# Altium PCB Genimi_v7.PcbDoc
Units mil, origin at the board's own origin, x right, y up, seen from the top; angles counter-clockwise.
Board outline 1500 x 750 mil, 4 copper layers (Top Layer, Signal Layer 1, Signal Layer 2, Bottom Layer), stack 30.634 mil thick; 84 components, 65 nets, 301 pads, 112 vias.
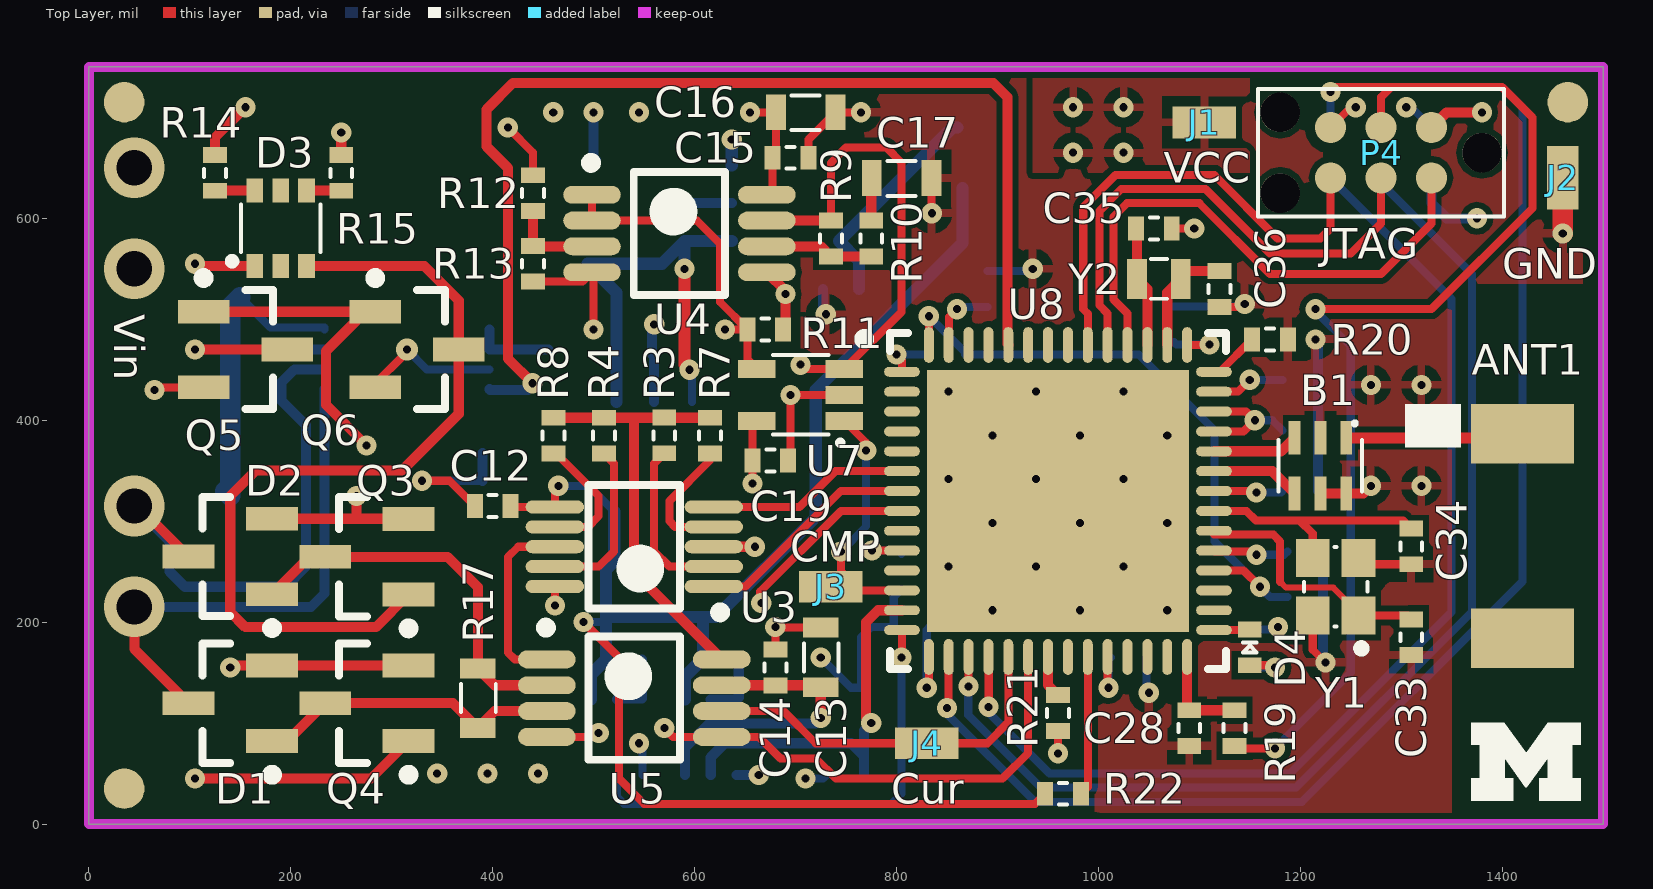
[diagram p0: Top Layer view]
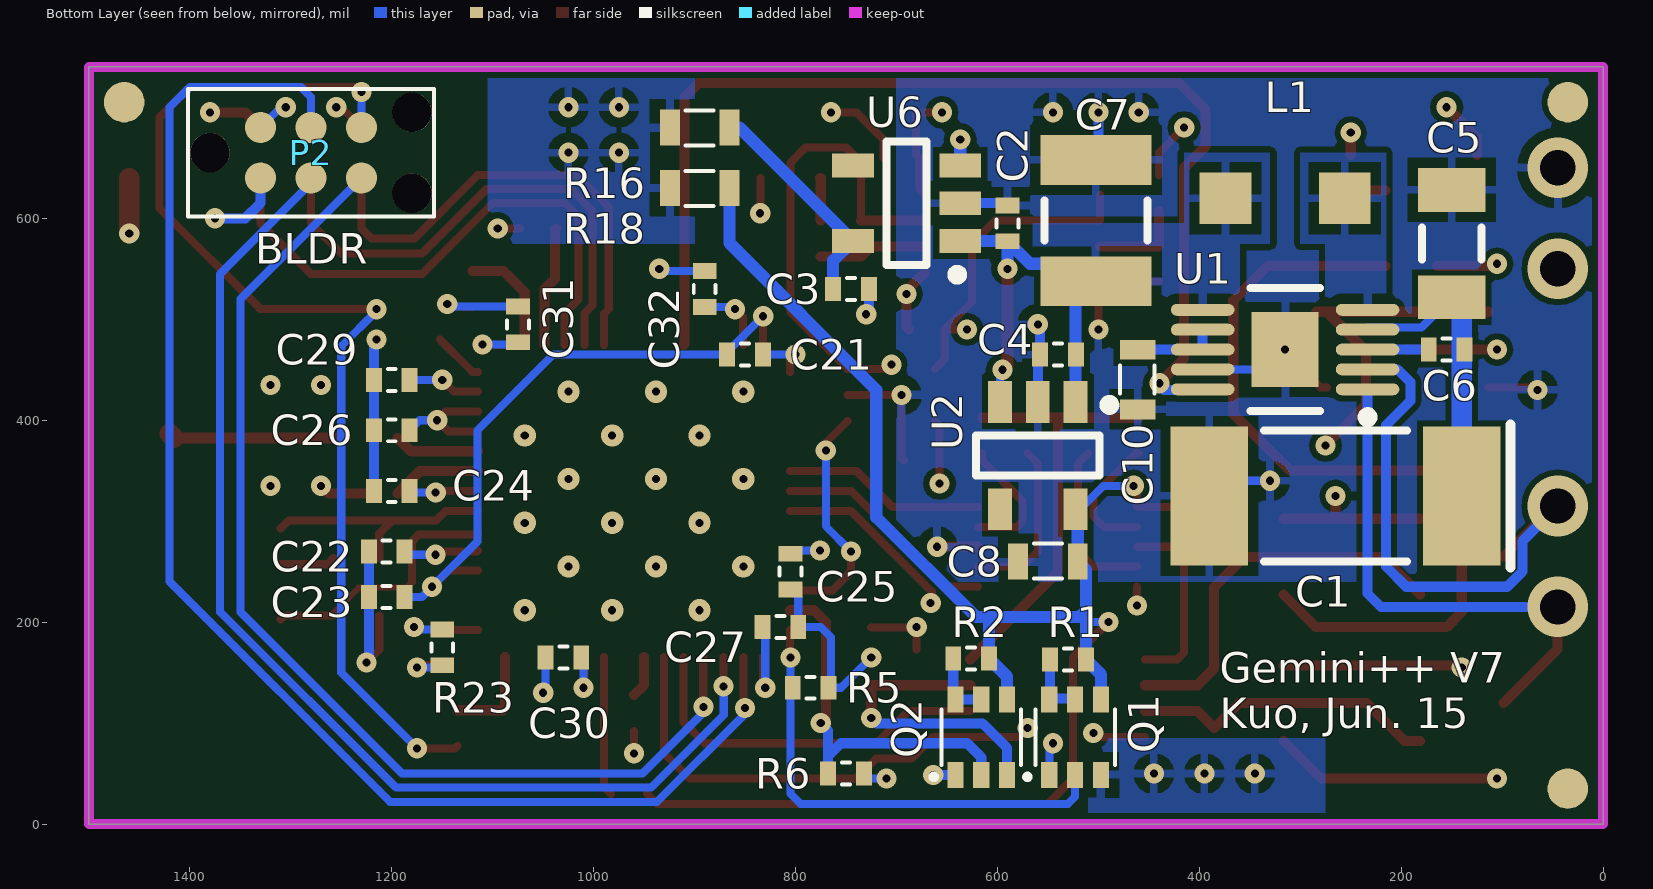
[diagram p1: Bottom Layer view, seen from below]
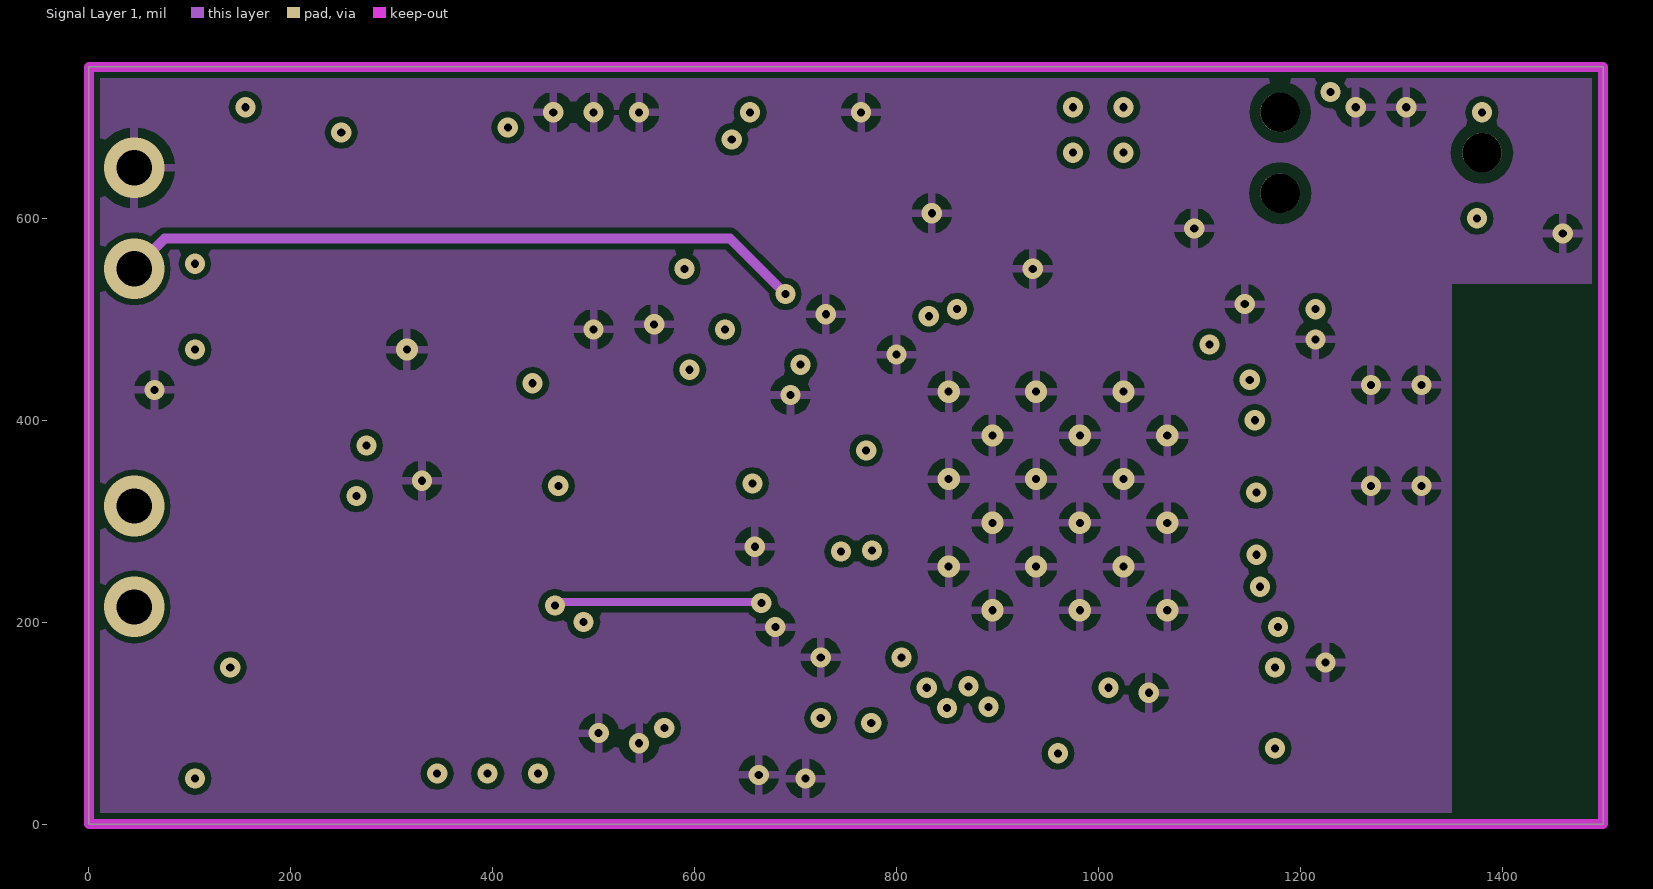
[diagram p2: Signal Layer 1]
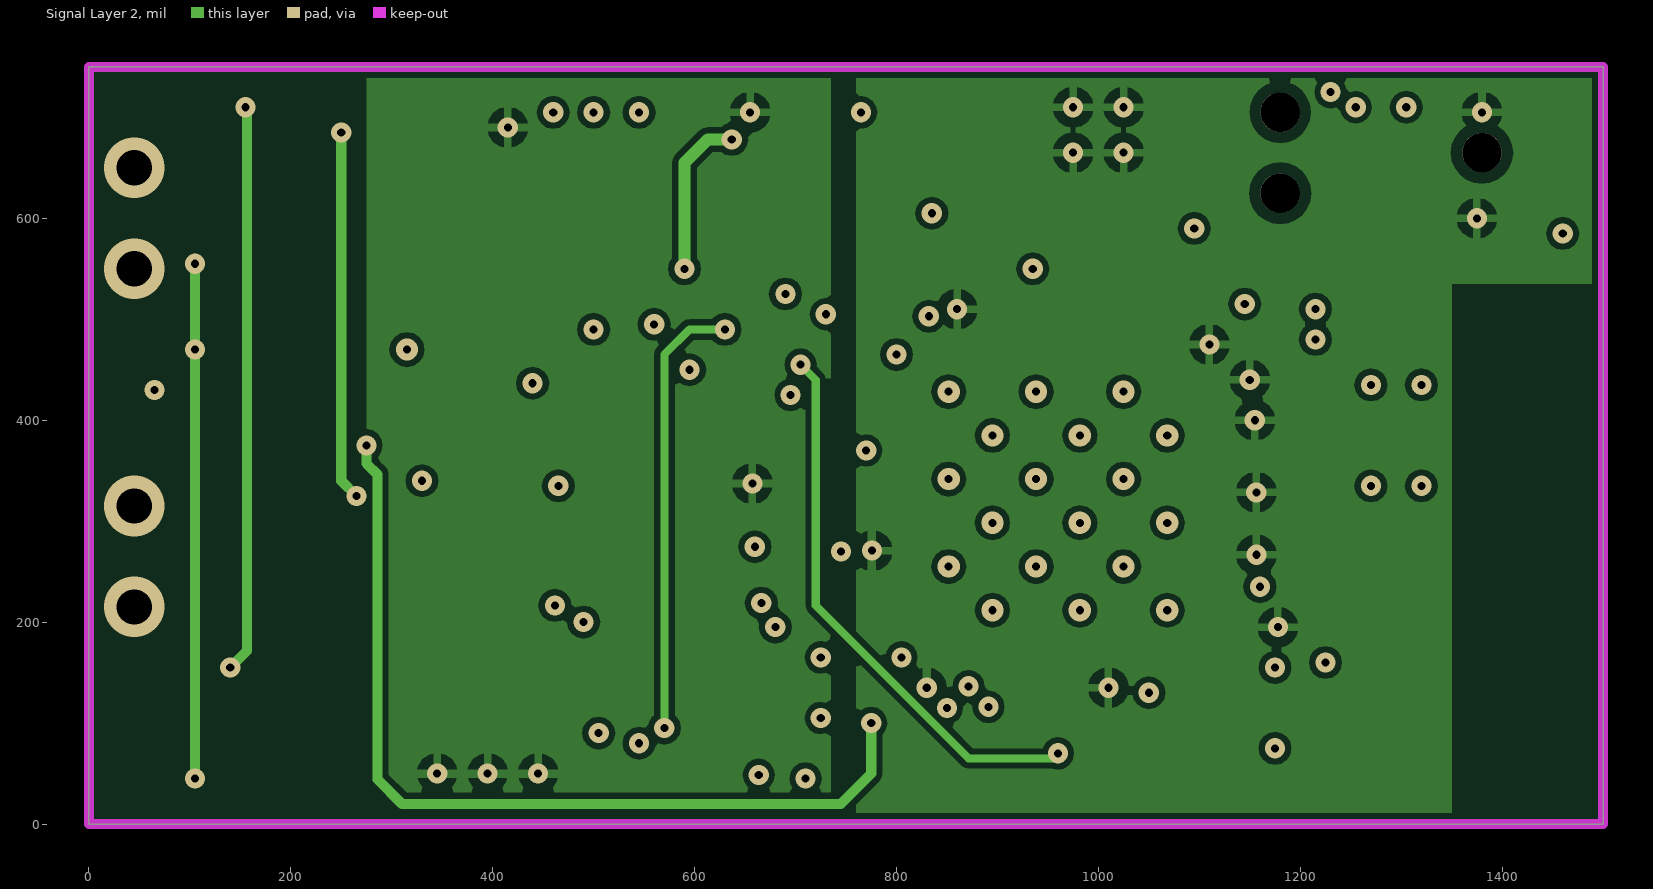
[diagram p3: Signal Layer 2]

## Layer stack, top to bottom
Top Solder: solder mask 0.4, Solder Resist, Dk 3.5
Top Layer: signal copper 1.4
Dielectric 1: core 10, FR-4, Dk 4.2
Signal Layer 1: signal copper 1.417
Dielectric 3: prepreg 5, Dk 4.2
Signal Layer 2: signal copper 1.417
Dielectric 2: core 10, Dk 4.2
Bottom Layer: signal copper 1.4
Bottom Solder: solder mask 0.4, Solder Resist, Dk 3.5

## Board outline
0,0 0,750 1500,750 1500,0

## Design rules (kind name [scope] priority, off if disabled: settings)
Clearance "non plated holes" [InPadClass('NPHOLES') vs (OnLayer('Signal Layer 1')) or (OnLayer('Signal Layer 2'))] p1: gap=11 // Sunstone Circuits Minimum Clearance Rule (MLB~4&6 Layer Designs)
Clearance "Clearance~Sunstone Circuits" [All] p2: gap=6 // Sunstone Circuits Minimum Clearance Rule (MLB~4&6 Layer Designs)
DiffPairsRouting [All] p1: maxlimit=10 minlimit=10 mostfreqgap=10 toplayer_minwidth=6 toplayer_maxwidth=15 toplayer_prefwidth=15 midlayer1_minwidth=6 midlayer1_maxwidth=15 midlayer1_prefwidth=15 midlayer2_minwidth=6 midlayer2_maxwidth=15 midlayer2_prefwidth=15 bottomlayer_minwidth=6 bottomlayer_maxwidth=15 bottomlayer_prefwidth=15 maxuncoupledlength=500
HoleSize "HoleSize~Sunstone Circuits" [All] p1: absolutevalues=TRUE maxlimit=251 minlimit=8 maxpercent=80.000 minpercent=20.000 // Sunstone Circuits Hole Size Rule (MLB~4&6 Layer Designs)
HoleSize Testpoint [All] p2: absolutevalues=TRUE maxlimit=100 minlimit=1 maxpercent=80.000 minpercent=20.000
HoleSize TestPointUsage [All] p3: absolutevalues=TRUE maxlimit=100 minlimit=1 maxpercent=80.000 minpercent=20.000
MinimumAnnularRing "MinimumAnnularRing~Sunstone Circuits" [All] p1 off: minimumring=6 // Sunstone Circuits Minimum Annular Ring (MLB~4&6 Layer Designs)
MinimumSolderMaskSliver [All] p1 off: minsoldermaskwidth=10
PlaneClearance "PlaneClearance~Sunstone Circuits" [All] p1: clearance=12 // Sunstone Circuits Power Plane Clearance Rule (MLB~4&6 Layer Designs)
PlaneConnect "PlaneConnect~Sunstone Circuits" [All] p1: planeconnectstyle=Relief reliefexpansion=10 reliefentries=4 reliefconductorwidth=8 reliefairgap=10 // Sunstone Circuits Power Plane Connect Rule (MLB~4&6 Layer Designs)
PolygonConnect "PolygonConnect~Sunstone Circuits" [All] p1: connectstyle=Relief reliefconductorwidth=8 reliefentries=4 polygonreliefangle="90 Angle" airgapwidth=10 // Sunstone Circuits Polygon Connect Style (MLB~4&6 Layer Designs)
RoomDefinition MCU [InComponentClass('MCU')] p1 off: confinementstyle=ConfineIn formatcopy=TRUE lockcomponents=FALSE outline 690.5,206.25 690.5,263.75 748.23,263.75 748.23,513.07 838.74,513.07 838.74,724.61 1145.98,724.61 1145.98,739.96 1414.02,739.96 1414.02,684.5 1488.75,684.5 1488.75,436.06 1491.1,436.06 1491.1,136.54 1163.7,136.54 1163.7,52.52 1007.48,52.52 1007.48,1.3 922.52,1.3 922.52,51.25 785.5,51.25 785.5,126.93 748.23,126.93 748.23,206.25
RoomDefinition IVSense [InComponentClass('IVSense')] p2 off: confinementstyle=ConfineIn formatcopy=TRUE lockcomponents=FALSE outline 391.3,317.52 391.3,402.48 411.3,402.48 411.3,667.48 450,667.48 450,674.72 652.52,674.72 652.52,688.7 653.74,688.7 653.74,739.61 766.26,739.61 766.26,674.61 861.26,674.61 861.26,605.39 827.48,605.39 827.48,106.3 792.48,106.3 792.48,21.3 707.52,21.3 707.52,22.84 471.66,22.84 471.66,42.83 405.32,42.83 405.32,189.84 405.32,317.52
RoomDefinition harvesting2 [InComponentClass('harvesting2')] p3 off: confinementstyle=ConfineIn formatcopy=TRUE lockcomponents=FALSE outline 68.74,440.39 68.74,509.61 85.63,509.61 85.63,695.71 217.35,695.71 217.35,700.87 418.06,700.87 418.06,720.47 569.94,720.47 569.94,696.85 776.82,696.85 776.82,558.7 787.48,558.7 787.48,501.3 641.85,501.3 641.85,278.18 606.26,278.18 606.26,225.39 493.74,225.39 493.74,235.28 76.77,235.28 76.77,440.39
RoomDefinition current_switch [InComponentClass('current_switch')] p4 off: confinementstyle=ConfineIn formatcopy=TRUE lockcomponents=FALSE outline 26.57,28.98 26.57,345.55 66.26,345.55 66.26,560.71 96.3,560.71 96.3,687.48 278.7,687.48 278.7,560.71 403.74,560.71 403.74,180.94 419.92,180.94 419.92,68.43 364.06,68.43 364.06,28.98
RoutingVias "RoutingVias~Sunstone Circuits" [All] p1: holewidth=16 width=20 viastyle="Through Hole" minholewidth=6 minwidth=20 maxholewidth=20 maxwidth=40 // Sunstone Circuits Routing Vias Rule (MLB~4&6 Layer Designs)
ShortCircuit "ShortCircuit~Sunstone Circuits" [All] p1: allowed=FALSE // Sunstone Circuits Short Circuit Rule~Do Not Allow (MLB~4&6 Layer Designs)
SilkToSilkClearance [All] p1 off: silktosilkclearance=10
SilkToSolderMaskClearance [IsPad] p1 off: minsilkscreentomaskgap=10 clearancetoexposedcopper=TRUE
SolderMaskExpansion TentVias [isVia] p1: expansion=-20 // Sunstone Circuits Solder Mask Expansion Rule (MLB~4&6 Layer Designs)
SolderMaskExpansion "SolderMaskExpansion~Sunstone Circuits" [All] p2: expansion=3 // Sunstone Circuits Solder Mask Expansion Rule (MLB~4&6 Layer Designs)
ViasUnderSMD "ViasUnderSMD~Sunstone Circuits" [All] p1: allowed=FALSE // Sunstone Circuits Vias Under SMD~Do Not Allow (MLB~4&6 Layer Designs)
Width "Width~Sunstone Circuits" [All] p1: maxlimit=100 minlimit=6 preferedwidth=8 // Sunstone Circuits Minimum Width Rule (MLB~4&6 Layer Designs)
22 further rules are at their usual default settings.

## Classes and differential pairs
pad class NPHOLES: P4-0
component class MCU: ANT1 B1 C21 C22 C23 C24 C25 C26 C27 C28 C29 C30 C31 C32 C33 C34 C35 C36 D4 J1 J2 J3 J4 P2 P4 R16 R18 R19 R20 R21 R22 R23 U8 Y1 Y2
component class IVSense: C12 C13 C14 C15 C16 C17 C19 Q1 Q2 R1 R2 R3 R4 R5 R6 R7 R8 R9 R10 R11 R12 R13 U3 U4 U5 U7
component class harvesting2: C1 C2 C3 C4 C5 C6 C7 C8 C10 L1 U1 U2 U6
component class current_switch: D1 D2 D3 Q3 Q4 Q5 Q6 R14 R15 R17
differential pair CC2538_RF: +CC2538_RF_P -CC2538_RF_N

## Components (designator, comment, footprint, x,y, rotation, side; value= is the part's Value field where it differs from the comment)
ANT1 "Ground Antenna" "Chip Antenna" 1425,305 r270 top
B1 "2450BM15A0002E" 2450BM15A0002 1220,355 r270 top
C1 "Ceramic capacitor" 2917 265,325 r0 bottom
C2 "Ceramic capacitor" 0402 590,595 r90 bottom
C3 "Ceramic capacitor" 0402 745,530 r180 bottom
C4 "Ceramic capacitor" 0402 540,465 r0 bottom
C5 "Ceramic capacitor" 1206 150,575 r90 bottom
C6 "Ceramic capacitor" 0402 155,470 r0 bottom
C7 "Ceramic capacitor" 1210 498.39,597.8 r270 bottom
C8 "Ceramic capacitor" 0603 550,260 r0 bottom
C10 "Ceramic capacitor" 0603 461,440.31 r270 bottom
C12 "Ceramic capacitor" 0402 400,315 r180 top
C13 "Ceramic capacitor" 0603 725,165 r90 top
C14 "Ceramic capacitor" 0402 680,155 r90 top
C15 "Ceramic capacitor" 0402 695,660 r0 top
C16 "Ceramic capacitor" 0603 710,705 r0 top
C17 "Ceramic capacitor" 0603 805,640 r0 top
C19 "Ceramic capacitor" 0402 675,360 r0 top
C21 "Ceramic capacitor" 0402 850,465 r180 bottom
C22 "Ceramic capacitor" 0402 1205,270 r0 bottom
C23 "Ceramic capacitor" 0402 1205,225 r0 bottom
C24 "Ceramic capacitor" 0402 1200,330 r0 bottom
C25 "Ceramic capacitor" 0402 805,250 r270 bottom
C26 "Ceramic capacitor" 0402 1200,390 r0 bottom
C27 "Ceramic capacitor" 0402 815,195 r180 bottom
C28 "Ceramic capacitor" 0402 1090,95 r270 top
C29 "Ceramic capacitor" 0402 1200,440 r0 bottom
C30 "Ceramic capacitor" 0402 1030,165 r0 bottom
C31 "Ceramic capacitor" 0402 1075,495 r90 bottom
C32 "Ceramic capacitor" 0402 890,530 r90 bottom
C33 "Ceramic capacitor" 0402 1310,185 r90 top
C34 "Ceramic capacitor" 0402 1310,275 r90 top
C35 "Ceramic capacitor" 0402 1055,590 r0 top
C36 "Ceramic capacitor" 0402 1120,530 r270 top
D1 "D_BAS40-04" SOT23-3 140,119.68 r180 top
D2 "D_BAS40-04" SOT23-3 140,265 r180 top
D3 "BAS40TW" SOT-363 190,590 r0 top
D4 "LED, Red" "0402 - DIODE" 1150,175 r90 top
J1 "RCU 0603 SMD Testpoint" RCU_0603 1105,695 r90 top
J2 "RCU 0603 SMD Testpoint" RCU_0603 1460,640 r180 top
J3 "RCU 0603 SMD Testpoint" RCU_0603 735,235 r90 top
J4 "RCU 0603 SMD Testpoint" RCU_0603 830,80 r90 top
L1 "Chip inductor" CDRH2D18 315,620 r180 bottom
P2 "TC2030" TC2030-IDC-NLFP 1280,665 r180 bottom
P4 "TC2030" TC2030-IDC-NLFP 1280,665 r180 top
Q1 "Si1539CDL" SC70-6 523,86 r180 bottom
Q2 "Si1539CDL" SC70-6 616,86 r180 bottom
Q3 "Si2301CDS" SOT23-3 275.32,264.68 r180 top
Q4 "Si2301CDS" SOT23-3 275.32,119.68 r180 top
Q5 "Si2338DS" SOT23-3 155,470 r0 top
Q6 "Si2338DS" SOT23-3 325,470 r0 top
R1 "Chip resistor" 0402 530,163 r0 bottom
R2 "Chip resistor" 0402 626,164 r0 bottom
R3 "Chip resistor" 0402 570,385 r270 top
R4 "Chip resistor" 0402 510.32,384.68 r90 top
R5 "Chip resistor" 0402 785,135 r180 bottom
R6 "Chip resistor" 0402 750,50 r180 bottom
R7 "Chip resistor" 0402 615.32,384.68 r270 top
R8 "Chip resistor" 0402 460.32,384.68 r90 top
R9 "Chip resistor" 0402 735,580 r270 top
R10 "Chip resistor" 0402 775,580 r90 top
R11 "Chip resistor" 0402 670,490 r0 top
R12 "Chip resistor" 0402 440,625 r270 top
R13 "Chip resistor" 0402 440,555 r270 top
R14 "Chip resistor" 0402 125,645 r270 top
R15 "Chip resistor" 0402 250,645 r270 top
R16 "Chip resistor" 0603 895,690 r180 bottom
R17 "Chip resistor" 0603 385.32,124.68 r90 top
R18 "Chip resistor" 0603 895,630 r180 bottom
R19 "Chip resistor" 0402 1135,95 r270 top
R20 "Chip resistor" 0402 1170,480 r0 top
R21 "Chip resistor" 0402 960,110 r90 top
R22 "Chip resistor" 0402 965,30 r0 top
R23 "Chip resistor" 0402 1150,175 r90 bottom
U1 "LTC3588-1" TSSOP50P490X110_HS-11N 315,470 r0 bottom
U2 "ADP151" SOT23-5 560,365 r270 bottom
U3 "ADG704" USOIC-10 540.32,274.68 r180 top
U4 "MCP6032" MSOP-8 585,585 r0 top
U5 "INA333" MSOP-8 540.32,124.68 r0 top
U6 "ADP151" SOT23-5 690,615 r0 bottom
U7 "TS881" SC70-5 705,425 r90 top
U8 "CC2538" QFN56 960,320 r0 top
Y1 "FA-128" FA-128 1235,235 r90 top
Y2 "ABS05" ABS05 1060,540 r180 top

## Footprints (in the part's own frame and the unit in brackets; to place one, negate y for a bottom-side part, rotate by r counter-clockwise, add the part's x,y. Pads: shape width x height; smd on the part's side, far side on the other; paste and mask are expansions set on the pad)
0402 [mm] "2-Leads, Body 1.00x0.50mm, IPC Medium Density"
  rect 0.4x0.6 smd: 1(-0.45,0) 2(0.45,0)
  silkscreen extent -0.1,-0.28 0.1,0.28, body extent -0.53,-0.28 0.53,0.27, height 0.4
"0402 - DIODE" [mm] "2-Leads, Body 1.00x0.50mm, IPC Medium Density"
  rect 0.4x0.6 smd: 1(-0.45,0) 2(0.45,0)
  silkscreen extent -0.13,-0.18 0.13,0.18, body extent -0.53,-0.28 0.53,0.27, height 0.4
0603 [mm] "2-Leads, Body 1.55x0.85mm, IPC Medium Density"
  rect 0.5x0.9 smd: 1(-0.75,0) 2(0.75,0)
  silkscreen extent -0.35,-0.45 0.35,0.43, body extent -0.75,-0.42 0.75,0.43, height 0.5
1206 [mm]
  rect 1.1x1.7 smd: 1(-1.35,0) 2(1.35,0)
  silkscreen extent -0.4,-0.75 0.4,0.75, body extent -1.7,-0.9 1.7,0.9, height 1.3
1210 [mm]
  rect 1.25x2.8 smd: 1(1.525,-0.102) 2(-1.525,-0.102)
  silkscreen extent -0.5,-1.4 0.5,1.2, body extent -1.8,-1.5 1.8,1.3, height 2.8
2450BM15A0002 [mm] "Chip Array, Flat, 6-Leads, Pitch 0.65mm,  Body 2.00x1.25mm,  IPC Medium Density"
  rect 0.85x0.3 smd: 1(-0.7,0.65) 2(-0.7,0) 3(-0.7,-0.65) 4(0.7,-0.65) 5(0.7,0) 6(0.7,0.65)
  silkscreen extent -1.11,-1.05 0.65,1.05, body extent -0.67,-1.05 0.67,1.05, height 0.81
2917 [mm] "Chip Capacitor, 2-Leads, Body 7.30x3.20mm, IPC Medium Density"
  rect 1.95x3.5 smd: 1(-3.175,0) 2(3.175,0)
  silkscreen extent -4.4,-1.8 1.8,1.8, body extent -3.8,-1.75 3.8,1.75, height 3.1
ABS05 [mm] "ABS05 Crystal"
  rect 0.5x1 smd: 1(-0.55,0) 2(0.55,0)
  silkscreen extent -0.2,-0.5 0.2,0.5, body extent -0.8,-0.5 0.8,0.5, height 0.5
CDRH2D18 [mm] "Sumdia SMD power inductor"
  rect 1.3x1.3 smd: 1(-1.5,0) 2(1.5,0)
  body extent -1.5,-1.7 1.5,1.8, height 2
"Chip Antenna" [mm] "FR05-S1-N-0-102"
  rect 1.5x2.6 smd: 1(-2.075,-0.125) ""(3.075,-0.125)
  silkscreen extent -2.83,-3.08 -1.73,-1.68, body extent -3.03,-1.63 3.98,1.38, height 2.2
FA-128 [mm] "Seiko Epson FA-128 Crystal"
  rect 0.95x0.85 smd: 1(-0.725,-0.575) 2(0.725,-0.575) 3(0.725,0.575) 4(-0.725,0.575)
  silkscreen extent -1.63,-0.8 1,0.8, body extent -1,-0.8 1,0.8, height 0.5
MSOP-8 [mm] "TSOP, 8-Leads, Body 3.00x3.00mm, Pitch 0.65mm, IPC Medium Density"
  oval 1.45x0.45 smd: 1(-2.2,0.975) 2(-2.2,0.325) 3(-2.2,-0.325) 4(-2.2,-0.975) 5(2.2,-0.975) 6(2.2,-0.325) 7(2.2,0.325) 8(2.2,0.975)
  silkscreen extent -2.35,-1.55 1.15,1.9, body extent -1.55,-1.55 1.55,1.55, height 1.1
QFN56 [mm] "QFN, 56-Leads, Body 8.00x8.00mm, Pitch 0.50mm, Thermal Pad 6.60x6.60mm, IPC Medium Density"
  oval 0.9x0.25 smd: 1(-3.925,3.25) 2(-3.925,2.75) 3(-3.925,2.25) 4(-3.925,1.75) 5(-3.925,1.25) 6(-3.925,0.75) 7(-3.925,0.25) 8(-3.925,-0.25) 9(-3.925,-0.75) 10(-3.925,-1.25) 11(-3.925,-1.75) 12(-3.925,-2.25) 13(-3.925,-2.75) 14(-3.925,-3.25) 29(3.925,-3.25) 30(3.925,-2.75) 31(3.925,-2.25) 32(3.925,-1.75) 33(3.925,-1.25) 34(3.925,-0.75) 35(3.925,-0.25) 36(3.925,0.25) 37(3.925,0.75) 38(3.925,1.25) 39(3.925,1.75) 40(3.925,2.25) 41(3.925,2.75) 42(3.925,3.25)
  oval 0.25x0.9 smd: 15(-3.25,-3.925) 16(-2.75,-3.925) 17(-2.25,-3.925) 18(-1.75,-3.925) 19(-1.25,-3.925) 20(-0.75,-3.925) 21(-0.25,-3.925) 22(0.25,-3.925) 23(0.75,-3.925) 24(1.25,-3.925) 25(1.75,-3.925) 26(2.25,-3.925) 27(2.75,-3.925) 28(3.25,-3.925) 43(3.25,3.925) 44(2.75,3.925) 45(2.25,3.925) 46(1.75,3.925) 47(1.25,3.925) 48(0.75,3.925) 49(0.25,3.925) 50(-0.25,3.925) 51(-0.75,3.925) 52(-1.25,3.925) 53(-1.75,3.925) 54(-2.25,3.925) 55(-2.75,3.925) 56(-3.25,3.925)
  rect 6.6x6.6 smd: 57(0,0)
  silkscreen extent -5,-4.22 4.22,4.23, body extent -4.08,-4.07 4.07,4.08, height 1
RCU_0603 [mm]
  rect 0.8x1.6 smd: 1(0,0)
  body extent -0.4,-0.8 0.4,0.8, height 1.15
SC70-5 [mm]
  rect 0.45x0.95 smd: 1(-0.65,-1.1) 2(0,-1.1) 3(0.65,-1.1) 4(0.65,1.1) 5(-0.65,1.1)
  silkscreen extent -1.2,-1.01 1,0.7, body extent -1,-0.7 1,0.7, height 1.1
SC70-6 [mm]
  rect 0.406x0.648 smd: 1(-0.65,-0.95) 2(0,-0.95) 3(0.65,-0.95) 4(0.65,0.95) 5(0,0.95) 6(-0.65,0.95)
  silkscreen extent -1.21,-1 1,0.7, body extent -1,-0.7 1,0.7, height 1.1
SOT23-3 [mm] "SOT23, 3-Leads, Body 2.9x1.3mm, Pitch 0.95mm, Lead Span 2.3mm, IPC Medium Density"
  rect 1.3x0.6 smd: 1(-1.05,0.95) 2(-1.05,-0.95) 3(1.05,0)
  silkscreen extent -1.18,-1.5 0.7,1.92, body extent -0.7,-1.5 0.7,1.5, height 1.2
SOT23-5 [mm] "SOT23, 5-Leads, Body 2.90x2.45mm, Pitch 0.95mm, IPC Medium Density"
  rect 1.05x0.6 smd: 1(-1.35,0.95) 2(-1.35,0) 3(-1.35,-0.95) 4(1.35,-0.95) 5(1.35,0.95)
  silkscreen extent -1.4,-1.55 0.5,1.92, body extent -0.88,-1.52 0.87,1.53, height 1.45
SOT-363 [mm]
  rect 0.42x0.6 smd: 1(-0.65,-0.95) 2(0,-0.95) 3(0.65,-0.95) 4(0.65,0.95) 5(0,0.95) 6(-0.65,0.95)
  silkscreen extent -1.28,-0.88 1,0.6, body extent -1,-0.6 1,0.6, height 1
TC2030-IDC-NLFP [mil]
  round 39 hole 39 unplated: 0(-100,0) 0(100,-40) 0(100,40)
  round 31 smd paste-196.85: 1(-50,-25) 2(-50,25) 3(0,-25) 4(0,25) 5(50,-25) 6(50,25)
  Top Layer pour cut-out: -50,25 -50,-25 50,-25 50,25
  silkscreen extent -122,-63 122,63
TSSOP50P490X110_HS-11N [mm] "TSSOP, 10-Leads, Body 3.00x3.00mm, Pitch 0.50mm, Thermal Pad 1.88.2x1.68.2mm, IPC Medium Density"
  oval 1.6x0.3 smd: 1(-2.075,1) 2(-2.075,0.5) 3(-2.075,0) 4(-2.075,-0.5) 5(-2.075,-1) 6(2.075,-1) 7(2.075,-0.5) 8(2.075,0) 9(2.075,0.5) 10(2.075,1)
  rect 1.68x1.88 smd: 11(0,0)
  silkscreen extent -2.2,-1.55 0.87,1.82, body extent -1.55,-1.55 1.55,1.55, height 1.1
USOIC-10 [mm] "SOIC, 10-Leads, Body 3.00x3.00mm, Pitch 1.27mm, IPC Medium Density"
  oval 1.47x0.33 smd: 1(-2,1) 2(-2,0.5) 3(-2,0) 4(-2,-0.5) 5(-2,-1) 6(2,-1) 7(2,-0.5) 8(2,0) 9(2,0.5) 10(2,1)
  silkscreen extent -2.28,-1.55 1.15,1.78, body extent -1.55,-1.55 1.55,1.55, height 1.1

## Part data
ANT1: "2.4GHz Surface Mount Device (SMD) On Ground Antenna, 50 Ohms"
B1: "2.45 GHz Balun for TI CC253X"
C1: library part C_100u_25V_2917_tantalum, "Tantalum capacitor, 100u, 2917 package"
C2 C3 C4 C6 C21 C23 C32: library part C_1u_16V_0402_ceramic, "Ceramic capacitor, 1 uF, 16V, 0402 package"
C5: library part C_22u_35V_1206_ceramic, "Ceramic capacitor, 22 uF, 35 V, 1206 package"
C7: library part C_100u_10V_1210_ceramic, "Ceramic capacitor, 100u, 1210 package"
C8 C10: library part C_4.7u_10V_0603_ceramic, "Ceramic capacitor, 4.7u, 10V, 0603 package"
C12 C14 C15 C19 C22 C24 C25 C26 C27 C30 C31: library part C_0.1u_10V_0402_ceramic, "Ceramic capacitor, 0.1u, 0402 package"
C13 C16 C17: library part C_10u_6.3V_0603_ceramic, "Ceramic capacitor, 10 uF, 0603 package"
C28: library part C_1000p_50V_0402_ceramic, "Ceramic capacitor, 1000 pF, 0402 package"
C29: library part C_220p_50V_0402_ceramic, "Ceramic capacitor, 220 pF, 0402 package"
C33 C34: library part C_12p_0402_ceramic, "Ceramic capacitor, 12 pF, 0402 package"
C35 C36: library part C_22p_0402_ceramic, "Ceramic capacitor, 22 pF, 0402 package"
D1 D2: "SURFACE MOUNT SCHOTTKY BARRIER DIODE"
D3: library part D_BAS40TW, "SURFACE MOUNT SCHOTTKY BARRIER DIODE ARRAYS"
D4: library part D_LED_RED_0402, "LED, Red, 0402"
J1 J2 J3 J4: library part Testpoint-0603, "0603 SMD Testpoint"
L1: library part L_10uH_1A_180m, "Chip inductor, 10 uH,  1A, 180 mOhm"
P2 P4: "TC2030-MCP-NL"
Q1 Q2: "N- and P-Channel 30 V (D-S) MOSFET"
Q3 Q4: "P-Channel 20 V (D-S) MOSFET"
Q5 Q6: "N-Channel 30 V (D-S) MOSFET"
R1 R2 R5 R6 R12 R13: library part R_1M_0402, "Chip resistor, 1M, 0402 package"
R3 R21 R22: library part R_0_0402, "Chip resistor, 0, 0402 package"
R4 R11: library part R_100K_0402, "Chip resistor, 100K, 0402 package"
R7: library part R_24.9K_0402, "Chip resistor, 24.9K, 0402 package"
R8: library part R_11K_0402, "Chip resistor, 11K, 0603 package"
R9 R14 R15: library part R_47K_0402, "Chip resistor, 47K, 0402 package"
R10: library part R_100_0402, "Chip resistor, 100, 0402 package"
R16 R18: library part R_0_0603, "Chip resistor, 0, 0603 package"
R17: library part R_90.9_0603, "Chip resistor, 90.9, 0603 package"
R19 R23: library part R_2.2K_0402, "Chip resistor, 2.2K, 0402 package"
R20: library part R_56K_0402, "Chip resistor, 56K, 0402 package"
U1: "Piezoelectric Energy   Harvesting Power Supply"
U2 U6: "Ultralow Noise, 200 mA,  CMOS Linear Regulator"
U3: "CMOS  Low Voltage 4 V, 4-Channel Multiplexer"
U4: "0.9 £gA, High Precision Op Amps"
U5: "Micro-Power (50£gA), Zero-Drift, Rail-to-Rail Out  Instrumentation Amplifier"
U7: "Rail-to-rail 0.9 V nanopower comparator"
U8: "A Powerful System-On-Chip for 2.4-GHz IEEE 802.15.4, 6LoWPAN  and ZigBee Applications"
Y1: "MHz Range Crystal Unit"
Y2: "32768 Hz SMD Low profile crystal"

## Free pads (board coordinates)
  round 40 smd mask-5: ""(35,35) ""(35,715) ""(1465,715)
  round 40 smd far side mask-5: ""(35,35) ""(35,715) ""(1465,715)

## Via types
v1: diameter 20, hole 8, Top Layer to Bottom Layer, 89 vias
v2: diameter 22, hole 8, Top Layer to Bottom Layer, 19 vias
v3: diameter 60, hole 35, Top Layer to Bottom Layer, 4 vias

## Nets (pads, with @x,y where several pads share a name; then routed paths per layer and width w, separated by ;. In a path a pad name is that pad's centre, name@x,y a point inside that pad or via, vN(x,y) a via of type N, cw(c..) or ccw(c..) an arc to the next point about the centre after c; other vN are vias at no path point)
BLD_CTRL: P2.5 U8.18 | length 1085.1
  Top Layer w8: v1(891.1,116.1) 891.42,116.42 891.42,165.16 U8.18
  Bottom Layer w8: v1(891.1,116.1) 891.1,110.61 951.72,50 1190,50 1350,210 1350,520 P2.5
BLD_RX: P2.4 U8.16 | length 1405.6
  Top Layer w8: v1(850,115) 851.42,116.42 851.42,165.16 U8.16
  Bottom Layer w8: v1(850,115) 850,109.12 937.12,22 1201.6,22 1420,240.4 1420,710 1400,730 1290,730 1280,720 P2.4
BLD_TX: P2.3 U8.17 | length 1125.7
  Top Layer w8: v1(871.42,136.42) U8.17
  Bottom Layer w8: v1(871.42,136.42) 871.1,136.1 871.1,107.82 942.92,36 1195.8,36 1370,210.2 1370,545 1280,635 P2.3
CC2538_RF_N: B1.3 U8.38 | length 85.4
  Top Layer w10: U8.38 1181.06,369.21 B1.3
CC2538_RF_P: B1.4 U8.37 | length 89
  Top Layer w10: U8.37 1172.32,349.53 B1.4
CURRENT_WAVEFORM: J4.1 U5.6 U8.19 | length 370.6
  Top Layer w8: U5.6 688.11,111.89 720,80 890,80 911.1,101.1 911.1,165.16 U8.19
CURRENTMEASUREEN: Q2.2 Q5.1 Q6.1 R6.1 U8.13 | length 1607.5
  Top Layer w10: Q5.1 Q6.1@273.66,507.4 ; v1(275,375) 235,415 235,468.74 Q6.1@273.66,507.4 ; Q6.1 Q6.1@273.66,507.4 ; v1(775,100) 770,105 770,200 781.73,211.73 U8.13
  Signal Layer 2 w10: v1(275,375) 275,357 286,346 286,44 310,20 745,20 775,50 v1(775,100)
  Bottom Layer w10: Q2.2 616,66 630,80 755,80 767.72,67.28 ; R6.1 767.72,67.28 ; v1(775,100) 767.72,92.72 767.72,67.28
GND: B1.2 B1.5 B1.6 C1.2 C2.2 C3.2 C4.2 C5.2 C7.2 C8.2 C10.2 C12.2 C13.2 C14.2 C15.2 C16.2 C17.2 C19.2 C21.2 C22.2 C23.2 C24.2 C25.2 C26.2 C27.2 C28.2 C29.2 C30.2 C31.2 C32.2 C33.1 C34.1 C35.2 C36.2 J2.1 P2.2 P4.5 Q1.1 Q2.1 Q5.2 Q6.2 R5.2 R6.2 R13.2 R20.2 U1.9 U1.11 U2.2 U3.3 U4.4 U5.4 U6.2 U7.2 U8.1 U8.57 Y1.2 Y1.4 | length 2123.2
  Top Layer w8: v1(65,430) 67.6,432.6 Q5.2 ; Q6.2@273.66,432.6 280,432.6 315,467.6 v2(315,470) ; v1(330,340) 357.28,340 C12.2 ; R13.2 489.06,537.28 U4.4 500,545 v1(500,490) ; U5.4 501.3,86.3 v1(505,90) ; C14.2 v1(680,195) 680.47,194.53 C13.2 ; C19.2 695,362.28 v1(695,425) U7.2 ; C15.2 712.72,678.19 C16.2 v1(765,705) ; v1(800,465) 805.47,459.53 U8.1 ; C17.2 834.53,605.47 v1(835,605) ; C35.2 v1(1095,590) ; C36.2 1142.28,512.28 v1(1145,515) ; Y1.4 1212.36,172.64 v1(1225,160) ; P4.5 1250,710 v1(1255,710) ; Y1.2 1263.9,257.28 C34.1
  Top Layer w10: U3.3 v1(659.68,274.68) ; B1.5 B1.6 1262.44,327.44 v1(1270,335)
  Top Layer w20: v1(1460,585) J2.1
  Bottom Layer w8: v2(315,470) 334.69,450.31 U1.9 ; v1(330,340) C1.2@390,340 ; v1(545,80) 548.59,76.41 Q1.1 ; v1(710,45) 727.28,45 R6.2 ; v1(725,165) 755,135 R5.2 765,137.28 765,185 775,195 C27.2 797.28,224.57 C25.2 ; v1(800,465) C21.2 ; C32.2 932.72,547.72 v1(935,550) ; C30.2 1047.72,132.28 v1(1050,130) ; C31.2 1142.72,512.72 v1(1145,515) ; v1(1305,710) 1310,710 P2.2
  Bottom Layer w10: C1.2@390,340 C1.2@390,367.37 ; v1(500,705) 500,660.22 C7.2 ; U2.2 560,462.72 C4.2 557.72,492.72 v1(560,495) ; C2.2 592.28,615 U6.2 ; Q2.1 v1(663.6,48.6) ; C3.2 727.28,507.72 v1(730,505) ; v1(1215,480) 1217.72,477.28 C29.2 C26.2 C24.2 ; C22.2 C23.2 1222.72,162.28 v1(1225,160)
  other v1: 1320,335 1270,435 1320,435 460,705 545,705
  other v2: 895.04,211.73 981.65,211.73 1068.27,211.73 851.73,255.04 938.35,255.04 1024.96,255.04 895.04,298.35 981.65,298.35 1068.27,298.35 851.73,341.65 938.35,341.65 1024.96,341.65 895.04,384.96 981.65,384.96 1068.27,384.96 851.73,428.27 938.35,428.27 1024.96,428.27
  other v3: 45,650
IN+: D1.1 Q4.3 R17.1 U5.3 | length 304.9
  Top Layer w10: D1.1 196.57,82.28 Q4.3 360.79,119.68 R17.1 402.05,111.89 U5.3
IN-: D2.1 Q3.3 R17.2 U5.2 | length 387.6
  Top Layer w10: D2.1 218.43,264.68 Q3.3 355.32,264.68 385.32,234.68 R17.2 402.05,137.48 U5.2
NetANT1_1: ANT1.1 B1.1 | length 176.2
  Top Layer w10.78: B1.1 ANT1.1@1415.95,382.56
  Top Layer w19.7: ANT1.1@1415.95,382.56 ANT1.1
NetC6_2: C6.2 U1.3 | length 56.1
  Bottom Layer w10: C6.2@177.24,470 U1.3
NetC10_1: C10.1 U1.7 U1.8 | length 78.5
  Bottom Layer w10: U1.7 U1.8 C10.1@455.47,470
NetC17_1: C17.1 R10.2 | length 42.5
  Top Layer w10: R10.2 775,639.53 C17.1
NetC21_1: C21.1 C23.1 U8.32 U8.56 | length 616.7
  Top Layer w8: U8.56 v1(832.05,502.95) ; U8.32 1143.9,251.1 v1(1160,235)
  Bottom Layer w8: v1(832.05,502.95) 867.72,467.28 C21.1 1040,465 1115,390 1115,280 v1(1160,235) 1170,225 C23.1
NetC28_1: C28.1 R19.1 U8.28 | length 98.6
  Top Layer w10: U8.28 1087.95,114.76 C28.1 R19.1
NetC33_2: C33.2 U8.34 Y1.1 | length 259.1
  Top Layer w6: 1180,240 1185.84,234.16 1232.82,234.16 1257.64,209.34 Y1.1
  Top Layer w8: U8.34 1114.53,286.71 1173.29,286.71 1180,280 1180,240 ; Y1.1 1306.26,206.46 C33.2
NetC34_2: C34.2 U8.35 Y1.3 | length 245.3
  Top Layer w8: U8.35 1146.56,310.16 1156.01,300.71 1199.29,300.71 ; Y1.3 1212.36,287.64 1199.29,300.71 ; C34.2 1302.01,300.71 1199.29,300.71
NetC35_1: C35.1 U8.45 Y2.2 | length 120.2
  Top Layer w10: C35.1 1038.35,588.94 Y2.2 1048.58,529.76 U8.45
NetC36_1: C36.1 U8.44 Y2.1 | length 112.6
  Top Layer w10: U8.44 1068.27,526.61 Y2.1 1089.37,547.72 C36.1
NetD1_2: D1.2 Q4.2 R14.1 | length 799.8
  Top Layer w10: R14.1 125,680 v1(155,710) ; v1(140,155) 142.09,157.09 D1.2 Q4.2
  Signal Layer 2 w10: v1(140,155) 156.65,171.65 156.65,708.35 v1(155,710)
NetD1_3: D1.3 U1.1 | length 513.7
  Top Layer w10: v3(45,215) 45,173.35 D1.3
  Bottom Layer w10: v3(45,215) 220,215 233.31,228.31 U1.1
NetD2_2: D2.2 Q3.2 R15.1 | length 546.5
  Top Layer w10: D2.2 265,302.4 ; R15.1 v1(250,685) ; v1(265,325) 265,302.4 ; Q3.2 316.34,302.4 265,302.4
  Signal Layer 2 w10: v1(250,685) 250,340 v1(265,325)
NetD2_3: D2.3 U1.2 | length 543.8
  Top Layer w10: v3(45,315) 48.66,315 D2.3
  Bottom Layer w10: v3(45,315) 80,280 80,250 95,235 195,235 215,255 215,395 190.81,419.19 190.81,437.63 203.49,450.31 U1.2
NetD3_1: D3.1 Q4.1 Q5.3 | length 887.8
  Top Layer w10: v1(105,45) 279.37,45 Q4.1 ; v1(105,470) Q5.3 ; v1@105,552.6 D3.1
  Signal Layer 2 w10: v1(105,45) v1(105,470) v1(105,555)
NetD3_3: D3.3 Q3.1 Q6.3 | length 848.4
  Top Layer w10: D3.3 332.4,552.6 366.34,518.66 Q6.3 366.34,406.34 310,350 165,350 140,325 140,210 155,195 284.37,195 Q3.1
NetD3_4: D3.4 R15.2 | length 39.5
  Top Layer w10: D3.4 254.69,627.4 R15.2@255,627.72
NetD3_6: D3.6 R14.2 | length 39.5
  Top Layer w10: R14.2@125,627.72 164.09,627.72 D3.6
NetD4_1: D4.1 R23.1 | length 51.9
  Top Layer w8: D4.1 1172.72,157.28 v1(1175,155)
  Bottom Layer w8: R23.1 1152.28,155 v1(1175,155)
NetL1_2: L1.2 U1.5
NetQ1_5: Q1.5 Q1.6 R1.2 | length 63.8
  Bottom Layer w10: Q1.5 523.87,124.28 547.72,124.28 R1.2
NetQ2_5: Q2.5 Q2.6 R2.2 | length 67.1
  Bottom Layer w10: Q2.5 Q2.6 643.72,125.53 R2.2
NetR3_2: R3.2 U3.2 | length 166.7
  Top Layer w8: R3.2 560,357.28 560,270 575,255 U3.2
NetR4_1: R4.1 U3.9 | length 165.6
  Top Layer w8: U3.9 505,255 520,270 520,357.28 R4.1
NetR7_2: R7.2 U3.4 | length 130.1
  Top Layer w8: R7.2 615.32,360.32 575,320 575,300 580.63,294.37 U3.4
NetR8_1: R8.1 U3.7 | length 129.9
  Top Layer w8: R8.1 463.03,366.97 505,325 505,305 494.37,294.37 U3.7
NetR9_2: R9.2 R10.1 U4.6 | length 107.5
  Top Layer w10: U4.6 725.08,572.2 R9.2 R10.1
NetR20_1: R20.1 U8.42 | length 51
  Top Layer w8: U8.42 1120.24,447.95 R20.1
NetR21_2: R21.2 U8.21 | length 42.1
  Top Layer w10: U8.21@950,165.32 U8.21 950.16,137.56 R21.2
NetR22_2: R22.2 U8.23 | length 138.3
  Top Layer w8: R22.2 989.53,36.81 U8.23
NetU3_1: U3.1 U8.7 | length 225.6
  Top Layer w8: U3.1 650.31,235.31 744.84,329.84 U8.7
NetU3_5: U3.5 U8.6 | length 201.1
  Top Layer w8: U3.5 704.06,314.06 739.53,349.53 U8.6
NetU3_10: U3.10 U8.8 | length 410.5
  Top Layer w8: v1(461.57,216.57) U3.10 ; v1(666.11,218.89) 665,220 665,230.2 744.96,310.16 U8.8
  Signal Layer 1 w8: v1(461.57,216.57) 465,220 665,220 v1(666.11,218.89)
PD3: D4.2 U8.29 | length 35.7
  Top Layer w8: U8.29 1149.33,192.05 D4.2
PD4: U8.30
PGOOD: U1.10 U8.52 | length 1107.2
  Top Layer w10: v1(439.58,436.63) 415,461.21 415,650 394,671 394,708 420,734 896,734 910,720 910,475.32 U8.52
  Bottom Layer w10: U1.10 397.32,430 v1@435,430
R\E\S\E\T\: P2.6 P4.3 R19.2 | length 1161.6
  Top Layer w8: R19.2 1137.28,75 v1(1175,75) ; v1(1215,510) 1330,510 1430,610 1430,700 1400,730 1290,730 ; v1(1230,725) 1235,730 1290,730 ; P4.3 1280,720 1290,730
  Bottom Layer w8: v1(1175,75) 1250,150 1250,473.28 1215,508.28 v1(1215,510) ; P2.6 v1(1230,725)
RG1: U3.8 U5.1 | length 186.5
  Top Layer w8: U5.1 421.93,163.07 415.32,169.68 415.32,264.68 425.32,274.68 U3.8
RG2: R3.1 R4.2 R7.1 R8.2 U5.8 | length 427.9
  Top Layer w10: R8.2 R4.2 R7.1 ; 540,400 540,250 U5.8
TCK: P4.4 U8.47 | length 508.1
  Top Layer w8: U8.47 1009.21,505.67 1001,513.88 1001,607.34 1022.66,629 1106,629 1170,565 1250,565 1280,595 P4.4
TDO: P4.6 U8.48 | length 477.1
  Top Layer w8: U8.48 989.53,505.47 985,510 985,611.14 1016.86,643 1115,643 1115,642.62 1177.62,580 1220,580 1230,590 P4.6
TMS: P4.2 U8.46 | length 548.1
  Top Layer w8: U8.46 1028.9,505.78 1015,519.68 1015,601.54 1028.46,615 1100,615 1170,545 1280,545 1330,595 P4.2
V_HARVEST: C2.1 C4.1 C7.1 L1.1 U1.6 U2.1 U2.3 U6.1 U6.3 | length 650.3
  Top Layer w12: v1(590,550) 590,455 v1(595,450)
  Signal Layer 2 w12: v1(590,550) 590,655 613.15,678.15 v1(636.85,678.15)
  Bottom Layer w8: v1(595,450) 597.4,447.6 U2.3
  Bottom Layer w12: U2.1 522.6,526.36 494,554.96 567.68,554.96 C2.1 ; v1(590,550) C2.1 ; U6.1 590.31,577.6 C2.1 ; U6.3 v1(636.85,678.15)
VCAP: C1.1 C5.1 C6.1 U1.4 | length 305.9
  Bottom Layer w8: C5.1 180.04,491.81 233.31,491.81 U1.4
  Bottom Layer w20: C1.1@135,330 C1.1 140,511.85 C5.1
VCC3: C8.1 C12.1 Q1.4 Q2.4 R1.1 R2.1 R18.2 R22.1 U2.5 U3.6 | length 1685
  Top Layer w8: C12.1 418.66,314.06 U3.6 461.57,331.57 v1(465,335) ; v1(490,200) 525,165 525,45 550,20 937.28,20 R22.1
  Bottom Layer w8: v1(465,335) 495.2,335 U2.5@520.47,309.72 ; v1(490,200) 512.28,200
  Bottom Layer w12: Q1.4 497.41,148.13 R1.1 512.28,200 512.28,211.34 ; U2.5@520.47,309.72 C8.1 512.28,251.81 512.28,211.34 ; Q2.4 590.41,146.13 R2.1 608.28,201.72 605,205 ; R18.2 865.47,575.47 720,430 720,303.89 621.11,205 605,205 ; 512.28,211.34 518.62,205 605,205
VCC3_GATED1: C15.1 C16.1 C19.1 Q1.3 R12.1 U4.8 U7.5 | length 232.3
  Top Layer w8: v1(415,690) 440,665 R12.1 ; v1(655,705) C16.1 680.47,663.19 C15.1 677.28,629.06 U4.8 ; v1(657.28,337.28) C19.1 657.28,395 U7.5
  other v1: 345,50 395,50 445,50
VCC3_GATED2: C13.1 C14.1 Q2.3 U5.7 | length 308.4
  Top Layer w10: U5.7 727.05,137.48 C13.1@730,134.53 ; v1(725,105) C13.1
  Bottom Layer w10: Q2.3 590.41,75.41 614.65,99.65 719.65,99.65 v1(725,105)
VCC3_MCU: C3.1 R16.2 U6.5 | length 219.6
  Bottom Layer w12: C3.1 762.72,558.03 U6.5 855.55,690 R16.2@860.47,690
VCC_MCU: C22.1 C24.1 C25.1 C26.1 C27.1 C29.1 C30.1 C31.1 C32.1 J1.1 P2.1 P4.1 R16.1 R18.1 R23.2 U8.10 U8.15 U8.24 U8.33 U8.36 U8.39 U8.40 U8.41 U8.43 U8.55 | length 841.4
  Top Layer w8: v1(775.79,270.79) U8.10 ; v1(830,135) 832.05,137.05 U8.15 ; U8.55 852.05,474.84 852.05,502.05 v1(860,510) ; U8.24 1009.21,135.79 v1(1010,135) ; U8.43 1109.53,474.53 v1(1110,475) ; U8.33 1115.31,270 1153.28,270 v1(1156.58,266.71) ; U8.36 1155.16,329.84 v1(1156.47,328.53) ; U8.39 1143.9,388.9 v1(1155,400) 1146.42,408.58 U8.40 ; U8.41 1138.27,428.27 v1(1150,440)
  Top Layer w10: P4.1 1345,705 v1(1380,705)
  Bottom Layer w8: v1(775.79,270.79) 801.93,270.79 C25.1 ; v1(830,135) 830,192.28 C27.1 ; v1(860,510) 862.28,512.28 C32.1 ; v1(1010,135) 1010,162.72 C30.1 ; C31.1 1077.28,475 v1(1110,475) ; R23.2 1175.53,192.72 v1(1177.81,195) ; v1(1150,440) C29.1 ; v1(1155,400) 1172.28,400 C26.1 ; v1(1156.47,328.53) 1180.81,328.53 C24.1 ; v1(1156.58,266.71) 1183.99,266.71 C22.1
  Bottom Layer w10: P2.1 1330,615 1345,600 v1(1375,600)
  other v1: 975,665 1025,665 975,710 1025,710
VOLTAGE_WAVEFORM: R9.1 R21.1 U4.7 U7.3 | length 1048
  Top Layer w8: v1(705,455) 709.41,450.59 U7.3 805,507.28 805,655 790,670 750,670 735,655 R9.1 ; v1(960,70) R21.1
  Top Layer w10: U4.7 734.92,597.8 R9.1
  Signal Layer 2 w8: v1(705,455) 720,440 720,216.54 871.54,65 955,65 v1(960,70)
VOLTAGEMEASUREEN: Q1.2 R5.1 U8.14 | length 472.9
  Top Layer w8: v1(805,165) 805.47,165.47 U8.14
  Bottom Layer w8: Q1.2 523,27 530,20 795,20 805,30 v1(805,165)
VOLTAGESENSEIN: R11.2 U4.5 | length 745.4
  Top Layer w10: U4.5 690,528.23 v1(690,525) 690,492.28 R11.2
  Signal Layer 1 w10: v3(45,550) 75,580 635,580 v1(690,525)
VOLTAGETRIGGER: J3.1 U7.1 U8.12 | length 236.9
  Top Layer w8: v1(745,270) 745,250 763.58,231.42 U8.12 ; U7.1 770,377.72 v1(770,370)
  Bottom Layer w8: v1(745,270) 770,295 v1(770,370)
VREF: R12.2 R13.1 U4.3 | length 93.2
  Top Layer w10: R12.2 R13.1 440.51,572.2 U4.3
VREF_BUF: R11.1 U4.1 U4.2 U5.5 U7.4 U8.20 | length 1250.6
  Top Layer w8: U4.1 U4.2 602.2,597.8 625,575 625,517.28 R11.1 ; v1(570,95) 578.7,86.3 U5.5 663.7,86.3 685,65 720,65 740,45 905,45 930.47,70.47 U8.20 ; v1(630,490) R11.1 ; U7.4 652.28,460 R11.1
  Signal Layer 2 w8: v1(570,95) 570,465 595,490 v1(630,490)
pads on no net: ANT1. D3.2 D3.5 P2.0 P4.0 U2.4 U6.4 U8.2 U8.3 U8.4 U8.5 U8.9 U8.11 U8.22 U8.25 U8.26 U8.27 U8.31 U8.49 U8.50 U8.51 U8.53 U8.54

## Polygon pours and split planes (outlines as drawn)
NetL1_2 on Bottom Layer "Top Layer-No Net" (solid, pour order 37): 275,500 275,575 300,575 300,665 215,665 215,525 195,525 195,500
V_HARVEST on Bottom Layer "Top Layer-No Net" (solid, pour order 38): 330,665 330,575 360,575 360,505 360,500 440,500 565,500 565,595 415,595 415,665
VCC3_GATED1 on Bottom Layer "Top Layer-No Net" (solid, pour order 39): 510,85 510,0 445,0 275,0 275,85
GND on Bottom Layer "Top Layer-No Net" (solid, pour order 41): 455,240 0,240 0,750 700,750 700,240 520,240
VCC_MCU on Bottom Layer "Top Layer-No Net" (solid, pour order 43): 900,750 900,575 1105,575 1105,750
GND on Top Layer "Top Layer-No Net" (solid, pour order 42): 1480,0 1480,750 1335,750 705,750 705,0
VCC_MCU on Top Layer "Top Layer-No Net" (solid, pour order 36): 1150,750 1150,645 935,645 935,750
VCC3_GATED1 on Signal Layer 2 "Top Layer-No Net" (solid, pour order 40): 275,10 735,10 735,320 735,750 330,750 275,750 275,10
VCC_MCU on Signal Layer 2 "Top Layer-No Net" (solid, pour order 45): 760,750 760,0 1500,0 1500,750
GND on Signal Layer 1 "Top Layer-No Net" (solid, pour order 44): 0,0 0,750 1500,750 1500,0

## Keep-outs
Keep-Out Layer:
  the board outline again, w10

## Other copper
Top Layer:
  pour cut-out: 1500,2.5 1500,535 1350,535 1350,2.5
Signal Layer 1:
  pour cut-out: 1500,0 1500,535 1350,535 1350,0
Signal Layer 2:
  pour cut-out: 1500,2.5 1500,535 1350,535 1350,2.5

## Silkscreen, mask and mechanical layers (free items; w line width, h text height)
Top Overlay:
  region: 1369.61,23.12 1410.8,23.12 1410.8,45.11 1402.42,45.11 1402.42,65 1422.84,36.38 1424.23,36.38 1445,65 1445,45.11 1436.62,45.11 1436.62,23.12 1477.81,23.12 1477.81,45.11 1469.43,45.11 1469.43,78.26 1477.81,78.26 1477.81,100.25 1445.17,100.25 1424.23,71.28 1423.19,71.28 1402.25,100.25 1369.61,100.25 1369.61,78.26 1377.64,78.26 1377.64,45.11 1369.61,45.11
  text "VCC" at 1065,635 h30
  text "JTAG" at 1220,560 h30
  text "GND" at 1400,540 h30
  text "Vin" at 25,505 h30 r270
  text "CMP" at 694.8,260 h30
  text "Cur" at 795,20 h30
Bottom Overlay:
  text "BLDR" at 1335,555 h30
  text "Gemini++ V7" at 380,140 h30
  text "Kuo, Jun. 15" at 380,95 h30